# EAGLE board 5v_AC_DC_regulator (EAGLE 9.6.2)

Size 100 x 80 mm. Coordinates in mm from the lower left corner, seen from the top.
Outline: 0,0 100,0 100,80 0,80 0,0
Copper layers (1*16): Top 0.035mm / dielectric 1.5mm / Bottom 0.035mm
Design rules "default": minimum track width 6mil, minimum drill 0.35mm, track to track 6mil, track to pad 6mil, pad to pad 6mil, via to via 6mil, smd to smd 6mil, copper to edge 40mil, drill to drill 6mil, minimum pad ring 10mil, minimum via ring 8mil, stop-mask expansion 4mil, vias tented up to drill 0mil, thermal gap 10mil

## Footprints (pad centres in the part's own frame; a part is rotated, then mirrored left to right if it is on the bottom)
C2.5-3 = drill 0.813 pad 1.6 octagon: 1 -1.27,0; 2 1.27,0
DO41-10 = drill 1.118: A 5.08,0; C -5.08,0
JP1 = drill 0.914 long: 1 0,-1.27; 2 0,1.27
TO220H = drill 1.118 long: 1 -2.54,-10.16; 2 0,-10.16; 3 2.54,-10.16 | hole 3.302: 0,4.826

## Placement (x,y rotation side)
C1  1000  [C2.5-3]  -33.02,3.81 0 top  (outside the outline)
C2  0.33  [C2.5-3]  -38.1,3.81 0 top  (outside the outline)
C3  0.1u  [C2.5-3]  -15.24,25.4 0 top  (outside the outline)
D1  1N4004  [DO41-10]  -24.13,25.4 0 top  (outside the outline)
D2  1N4004  [DO41-10]  -19.05,33.02 0 top  (outside the outline)
D3  1N4004  [DO41-10]  -31.75,33.02 0 top  (outside the outline)
D4  1N4004  [DO41-10]  -19.05,40.64 0 top  (outside the outline)
I/O  [JP1]  -27.94,40.64 0 top  (outside the outline)
IC1  7805T  [TO220H]  -21.59,12.7 0 top  (outside the outline)
O/P  [JP1]  -34.29,40.64 0 top  (outside the outline)

## Library data of the parts
C1-C3 = capacitor-wima
D1-D4 = diode
I/O O/P = jumper
IC1 = linear

## Nets
GND: C1.1 C2.1 C3.1 D2.A D3.A IC1.2 O/P.2
N$1: D1.A D3.C I/O.2
N$3: D2.C D4.A I/O.1
N$4: C1.2 C2.2 D1.C D4.C IC1.1
N$5: C3.2 IC1.3 O/P.1

## Tracks (layer width: path | path; a pad name or v marks a point on that pad's centre or on a via)
GND  (6 unrouted)
N$1  (2 unrouted)
N$3  (2 unrouted)
N$4  (4 unrouted)
N$5  (2 unrouted)